# Altium PCB PCB1.PcbDoc
Units mil, origin at the board's own origin, x right, y up, seen from the top; angles counter-clockwise.
Board outline 795.03 x 795.61 mil, 2 copper layers (Top Layer, Bottom Layer), stack 61.756 mil thick; 11 components, 11 nets, 66 pads, 14 vias.
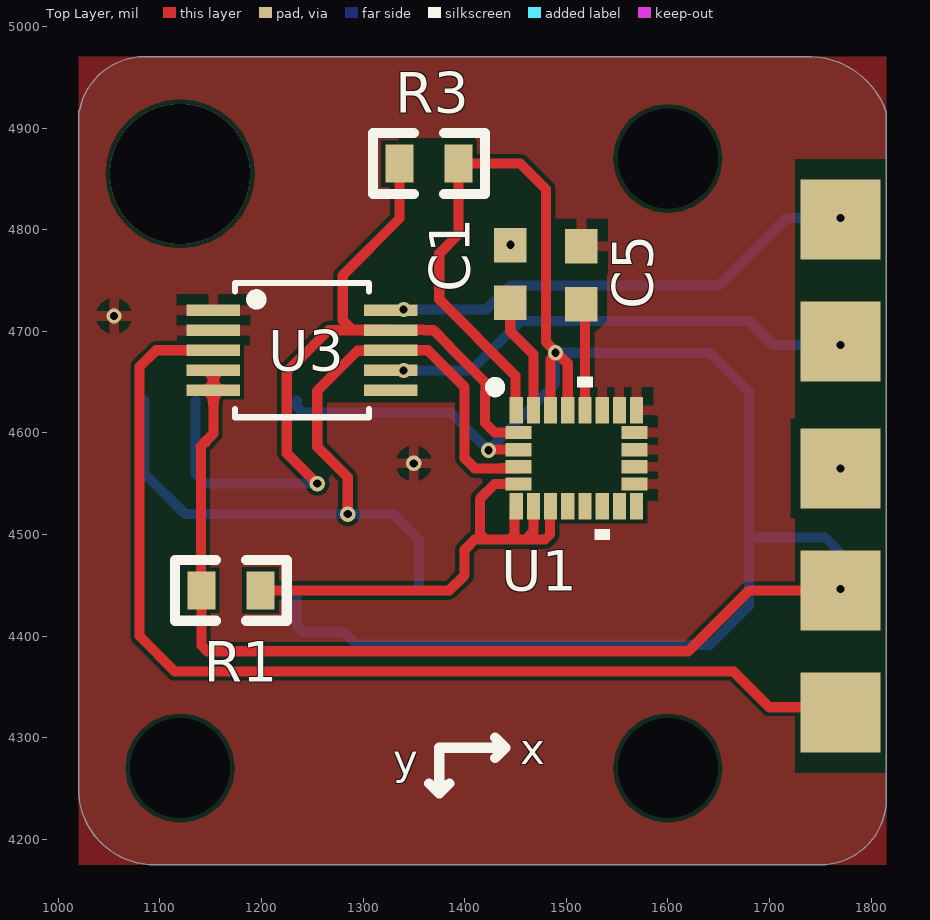
[diagram p0: Top Layer view]
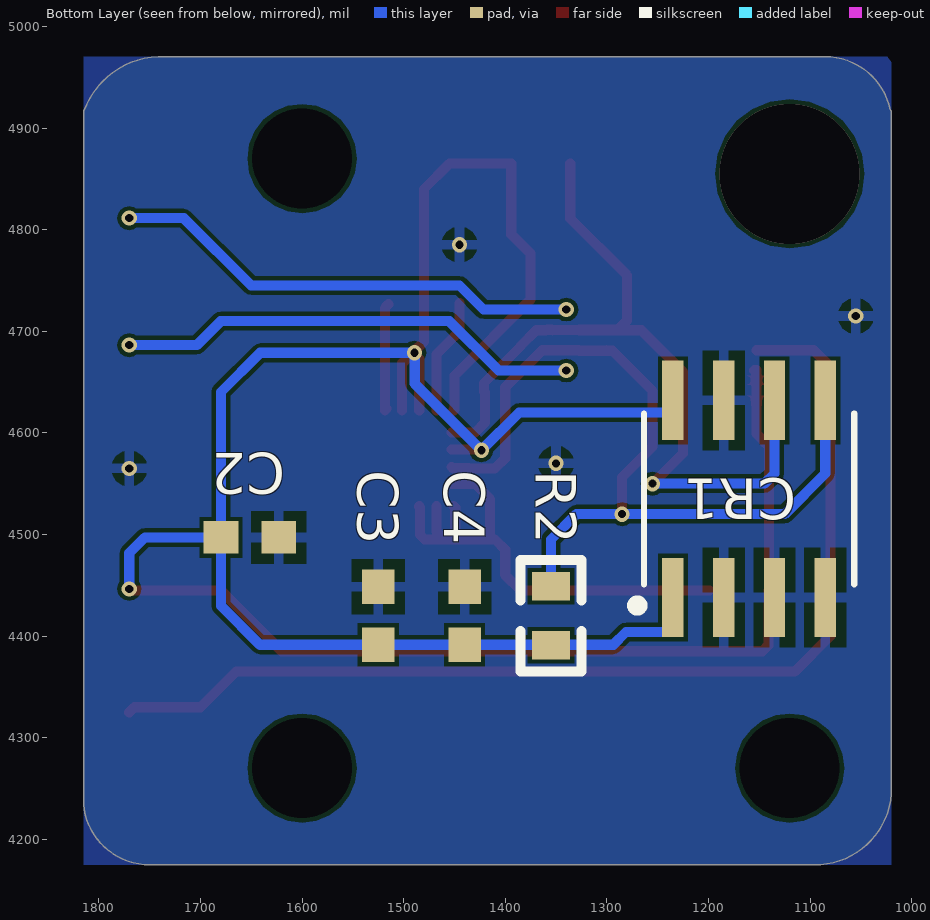
[diagram p1: Bottom Layer view, seen from below]

## Layer stack, top to bottom
Top Solder: solder mask 1, SM-001, Dk 4
Top Layer: signal copper 1.378
Dielectric 1: core 59, Core-043, Dk 4.3
Bottom Layer: signal copper 1.378
Bottom Solder: solder mask 1, SM-001, Dk 4

## Board outline
1020,4244.64 cw(c1025,4245) 1019.99,4245 1019.99,4915 cw(c1025,4915) 1021.12,4918.18 cw(c1085,4905) 1079.58,4970 cw(c1080,4965) 1080,4970.02 1733.02,4970.02 cw(c1734.98,4965.4) 1734.79,4970.41 cw(c1737.9,4888.71) 1814.71,4916.72 cw(c1810,4915) 1815.02,4915 1815.02,4235 cw(c1810,4235) 1815,4234.58 cw(c1750,4240) 1755.42,4175 cw(c1755,4180) 1755,4174.98 1100.18,4174.98 cw(c1095,4250) 1089.64,4175 cw(c1095,4250)
cut-out: 1275,5055

## Design rules (kind name [scope] priority, off if disabled: settings)
Clearance gaohaoyuan [All] p1: gap=4 ignorepadtopadclearanceinfootprint=TRUE
Clearance [All] p2: gap=10 ignorepadtopadclearanceinfootprint=FALSE except(0: Arc-Hole Track-Hole SMDPad-Hole THPad-Hole Via-Hole Fill-Hole Poly-Hole Region-Hole Text-Hole)
PolygonConnect [All] p1: connectstyle=Relief reliefconductorwidth=10 reliefentries=4 polygonreliefangle="90 Angle" airgapwidth=10
RoutingVias [All] p1: holewidth=28 width=50 viastyle="Through Hole" minholewidth=28 minwidth=50 maxholewidth=28 maxwidth=50
SolderMaskExpansion [All] p1: expansion=4 istentingtop=FALSE
Width [All] p1: maxlimit=10 minlimit=10 preferedwidth=10
30 further rules are at their usual default settings.

## Classes and differential pairs
component class Sheet1: C1 C2 C3 C4 C5 R1 R2 R3 U1 U3

## Components (designator, comment, footprint, x,y, rotation, side; value= is the part's Value field where it differs from the comment)
C1 "100NF" CC0603N_YAG 1445,4756.35 r90 top
C2 "100NF" CC0603N_YAG 1651.27,4497.02 r0 bottom
C3 "100NF" CC0603N_YAG 1525,4420 r90 bottom
C4 "10UF" CC0603N_YAG 1440,4420 r90 bottom
C5 "10NF" CC0603N_YAG 1515,4755 r90 top
CR1 "M24C02-WMN6TP" SO-8_STM 1160,4535 r90 bottom
R1 "10K" 0603_VIS 1170,4445 r0 top
R2 "10K" 0603_VIS 1355,4420 r90 bottom
R3 "10K" 0603_VIS 1365,4865 r180 top
U1 "LSM9DS1TR" LGA-24_3X3P5X1_STM 1510,4575 r0 top
U3 "LTC4316CMS#PBF" MSOP-10_MS_LIT 1240,4681.35 r0 top

## Footprints (in the part's own frame and the unit in brackets; to place one, negate y for a bottom-side part, rotate by r counter-clockwise, add the part's x,y. Pads: shape width x height; smd on the part's side, far side on the other; paste and mask are expansions set on the pad)
0603_VIS [mil]
  rect 27.68x37.4 smd paste+0 mask+0: 1(-29,0) 2(29,0)
  silkscreen extent -55,-30 55,30, body extent 0,0 10,10, height 10
CC0603N_YAG [mil]
  rect 34x32 smd paste+0 mask+0: 1(-28.5,0) 2(28.5,0)
  body extent 0,0 10,10, height 10
LGA-24_3X3P5X1_STM [mm]
  rect 0.331x0.654 smd: 1(-1.505,1.2) 6(-1.505,-1.2) 7(-1.075,-1.2) 8(-0.645,-1.2) 9(-0.215,-1.2) 10(0.215,-1.2) 11(0.645,-1.2) 12(1.075,-1.2) 13(1.505,-1.2) 18(1.505,1.2) 19(1.075,1.2) 20(0.645,1.2) 21(0.215,1.2) 22(-0.215,1.2) 23(-0.645,1.2) 24(-1.075,1.2)
  rect 0.654x0.331 smd: 2(-1.45,0.645) 3(-1.45,0.215) 4(-1.45,-0.215) 5(-1.45,-0.645) 14(1.45,-0.645) 15(1.45,-0.215) 16(1.45,0.215) 17(1.45,0.645)
  silkscreen extent -2.16,-2.03 0.84,2.03, body extent 0,0 0.25,0.25, height 0.25
MSOP-10_MS_LIT [mil]
  rect 52.5x11 smd paste+0 mask+0: 1(-87.25,39.4) 2(-87.25,19.7) 3(-87.25,0) 4(-87.25,-19.7) 5(-87.25,-39.4) 6(87.25,-39.4) 7(87.25,-19.7) 8(87.25,0) 9(87.25,19.7) 10(87.25,39.4)
  silkscreen extent -66,-66 66,66, body extent 0,0 10,10, height 10
SO-8_STM [mil]
  rect 78x21 smd paste+0 mask+0: 1(-97,75) 2(-97,25) 3(-97,-25) 4(-97,-75) 5(97,-75) 6(97,-25) 7(97,25) 8(97,75)
  silkscreen extent -110,-104 84,115, body extent 0,0 10,10, height 10

## Part data
C1 C2 C3 C4 C5: library part CC0603KRX7R9BB103, "No Description Available", Built_By=EMA_UL_Team, Copyright="Copyright (C) 2018 Accelerated Designs. All rights reserved", Manufacturer_Part_Number=CC0603KRX7R9BB103, RefDes=RefDes, SourceLibrary=Yageo_2008-01-01_ChipCaps1, Type=DEV, Vendor=Yageo
CR1 U1 U3: "No Description Available", Copyright="Copyright (C) 2018 Accelerated Designs. All rights reserved", RefDes=RefDes, Type=DEV
  CR1: Built_By=EMA_UL_Team, Manufacturer_Part_Number=M24C02-WMN6TP, SourceLibrary=Update_to_database_2020-12-04, Vendor=STMicroelectronics
  U1: Built_By=EMA_Jessica, Manufacturer_Part_Number=LSM9DS1TR, SourceLibrary=Updates_to_database_2020-11-03, Vendor=STMicroelectronics
  U3: Built_By=EMA_UL_Team, Manufacturer_Part_Number=LTC4316CMS#PBF, SourceLibrary=LinearTech_2016-05-13_6, Vendor="Linear Technology"
R1 R2 R3: library part MCT0603MD1002DP500, "No Description Available", Built_By=EMA_UL_Team, Copyright="Copyright (C) 2018 Accelerated Designs. All rights reserved", Manufacturer_Part_Number=MCT0603MD1002DP500, RefDes=RefDes, SourceLibrary=Vishay_2014-12-31, Type=DEV, Vendor=Vishay

## Free pads (board coordinates)
  round 60 hole 98.43: 2(1120,4270) 2(1600,4270) 2(1600,4870)
  rect 78.74x78.74 smd: 4(1770,4325) 4(1770,4445) 4(1770,4565) 4(1770,4690) 4(1770,4810)

## Via types
v1: diameter 15, hole 8, Top Layer to Bottom Layer, 13 vias
v2: diameter 137.8, hole 137.8, Top Layer to Bottom Layer, 1 vias

## Nets (pads, with @x,y where several pads share a name; then routed paths per layer and width w, separated by ;. In a path a pad name is that pad's centre, name@x,y a point inside that pad or via, vN(x,y) a via of type N, cw(c..) or ccw(c..) an arc to the next point about the centre after c; other vN are vias at no path point)
3.3V: C2.2 C3.1 C4.1 CR1.1 CR1.8 pad.4@1770,4445 R1.1 R2.1 R3.1 U1.1 U1.3 U1.22 U1.23 U3.4 U3.5 | length 3014
  Top Layer w10: U3.4 1154.7,4661.65 1155,4661.35 1152.95,4661.35 1152.75,4661.15 U3.5 1152.75,4599.1 1140,4586.35 1140.5,4585.85 1140.5,4445.5 R1.1 1141,4390.86 1146.86,4385 1620,4385 1680,4445 pad.4@1770,4445 ; v1@1421.54,4583.46 U1.3 ; U1.1 1450,4622.99 1450,4656.35 1375,4731.35 1375,4776.35 1394,4795.35 R3.1 1455,4865 1480,4840 1480,4689.62 1489.42,4680.2 v1(1489.42,4678.85) ; U1.23 1484.61,4672.68 1489.42,4677.49 v1(1489.42,4678.85) ; U1.22 1501.54,4668.46 1501.16,4668.46 1490.77,4678.85 v1(1489.42,4678.85)
  Bottom Layer w10: CR1.1 1235,4409.5 1240.5,4404 1281.11,4404 1293.61,4391.5 C4.1 C3.1 1641.5,4391.5 1679.77,4429.77 C2.2 ; CR1.8 1235,4625.5 1240.5,4620 1386.35,4620 v1(1423.46,4582.89) 1489.04,4648.47 v1@1489.04,4678.85 ; v1(1489.42,4678.85) 1641.15,4678.85 1679.77,4640.23 C2.2 ; v1(1770,4446.35) 1770,4481.68 1754.66,4497.02 C2.2
+5: 
GND: C1.2 C2.1 C3.2 C4.2 C5.2 CR1.2 CR1.3 CR1.4 CR1.7 pad.4@1770,4565 U1.14 U1.15 U1.16 U1.17 U1.18 U1.19 U1.20 U3.1 U3.2
  other v1: 1770,4565 1350,4570 1055,4715 1445,4785.15
PULL_UP1: R1.2 U1.5 U1.6 U1.7 U1.8 | length 508.3
  Top Layer w10: R1.2 1385,4445 1400,4460 1400,4485 1410,4495 1420.86,4495 ; U1.6 1449.24,4526.24 1449.24,4500.09 1444.14,4495 ; U1.5 1429.61,4549.61 1415,4535 1415,4500.86 1420.86,4495 ; U1.7 1467.68,4502.68 1460,4495 ; U1.8 1484.02,4527.17 1484.02,4499.88 1479.14,4495 1460,4495 ; 1420.86,4495 1444.14,4495 ; 1444.14,4495 1460,4495
PULL_UP2: CR1.5 R2.2 U1.4 U3.8 | length 853
  Top Layer w10: v1(1285,4520) 1285,4556.35 1255,4586.35 1255,4641.35 1294.5,4680.85 1326.75,4680.85 U3.8 1363.65,4681.35 1400,4645 1400,4575 1410,4565 1436.19,4565 1436.31,4565.12 1451.5,4565.12 U1.4
  Bottom Layer w10: CR1.5 1085,4560 1125,4520 v1(1285,4520) 1330,4520 1355,4495 R2.2
PULL_UP3: CR1.6 R3.2 U1.2 U3.9 | length 855.9
  Top Layer w10: v1(1255,4550) 1225,4580 1225,4660 1266.05,4701.05 U3.9 1326.75,4701.55 1289.3,4701.55 1280,4710.86 1280,4755 1336,4811 R3.2 ; U3.9@1329.85,4701.2 1330,4701.35 1360,4701.35 1360.41,4700.95 1369.55,4700.95 1385,4685.5 1385,4685 1420.86,4649.14 1420.86,4640.86 1420,4640 1420,4610 1429.61,4600.39 U1.2
  Bottom Layer w10: CR1.6 1135,4560 1145,4550 v1(1255,4550)
SCL: pad.4@1770,4810 U3.10 | length 467.3
  Bottom Layer w10: v1(1340,4721.35) 1421.35,4721.35 1445,4745 1650,4745 1716.35,4811.35 v1(1770,4811.35)
SDA: pad.4@1770,4690 U3.7 | length 461.3
  Bottom Layer w10: v1(1340,4661.35) 1406.35,4661.35 1455,4710 1680,4710 1703.65,4686.35 v1(1770,4686.35) v1@1769.04,4687.31
U1C1: C1.1 U1.24 | length 115.1
  Top Layer w10: C1.1@1444.92,4727.77 C1.1 1445,4700 1467.68,4677.32 U1.24
U1CAP: C5.1 U1.21 | length 107.7
  Top Layer w10: C5.1 1518.46,4723.04 U1.21 U1.21@1517.05,4623.66
XORL: pad.4@1770,4325 U3.3 | length 1065.6
  Top Layer w10: U3.3 1096.35,4681.35 1080,4665 1080,4400 1115,4365 1665,4365 1700,4330 1765,4330 pad.4@1770,4325
pads on no net: U1.9 U1.10 U1.11 U1.12 U1.13 U3.6
copper on no net:
  other v2: 1120,4855

## Polygon pours and split planes (outlines as drawn)
GND on Bottom Layer "GND_L02_P013" (solid, remove dead copper, pour order 13): 1018.97,4969.81 1019.16,4970 1815,4970 1815,4175 1020,4175 1020,4965
no net on Bottom Layer "NONET_L02_P012" (solid, pour order 12): 1020,4915
no net on Bottom Layer "NONET_L02_P011" (solid, pour order 11): 1020,4965
no net on Bottom Layer "NONET_L02_P001" (solid, pour order 1): 3460,4015
GND on Top Layer "GND_L01_P016" (solid, remove dead copper, pour order 16): 1020,4970 1815,4970 1815,4175 1020,4175

## Other copper
Top Layer:
  pour cut-out: 1540,4765 1540,4710.5 1529.5,4700 1515,4700 1515,4625.71 1518.46,4622.24 1501.22,4605 1450,4605 1410,4565 1400,4575 1400,4630 1250,4630 1255,4635 1255,4685.86 1280,4710.86 1280,4755 1336,4811 1335,4812 1335,4890 1409.54,4890 1411.84,4887.7 1411.84,4855.82 1451.2,4855.82 1467.02,4840 1480,4840 1480,4764.81 1480.19,4765
  pour cut-out: 1535,4705.5
  pour cut-out: 1725,4870 1725,4265 1820,4265 1820,4865 1815,4870
  pour cut-out: 1726.63,4853.37
  pour cut-out: 1605,4720
  pour cut-out: 1381.49,4782.84
  pour cut-out: 1465,4605 1555,4605 1555,4540 1465,4540

## Silkscreen, mask and mechanical layers (free items; w line width, h text height)
Top Overlay:
  lines w10: 1365,4255 1375,4245 ; 1385,4255 1375,4245 ; 1430,4280 1440,4290 ; 1430,4300 1440,4290 ; 1375,4245 1375,4290 1440,4290
  text "x" at 1455,4273.65 h30
  text "y" at 1330,4263.64 h30
Mechanical 1:
  lines w10: 1025,4915 1025,4245 ccw(c1095,4250) 1100,4180 ; 1025.61,4914.9 cw(c1085,4905) 1080,4965 ; 1075,4965 1080,4965 ; 1090,4180 1755,4180 ccw(c1750,4240) 1810,4235 1810,4380 1810,4915 ccw(c1737.9,4888.71) 1734.98,4965.4 ; 1745,4965 1080,4965

## Text inside footprints (layer, text, board x,y; h text height)
CR1: Mechanical 13 "*" at 1205.5,4458.5 h50 r270
U1: Mechanical 13 "*" at 1453.29,4583.86 h50
U3: Mechanical 13 "*" at 1181.5,4689.35 h50